# Altium PCB 7seg-rs485-slave.PcbDoc
Units mm, origin at the board's own origin, x right, y up, seen from the top; angles counter-clockwise.
Board outline 68.07 x 36.07 mm, 2 copper layers (Top Layer, Bottom Layer); 65 components, 59 nets, 207 pads, 0 vias.
Unrouted connection lines stored in the file: 139.
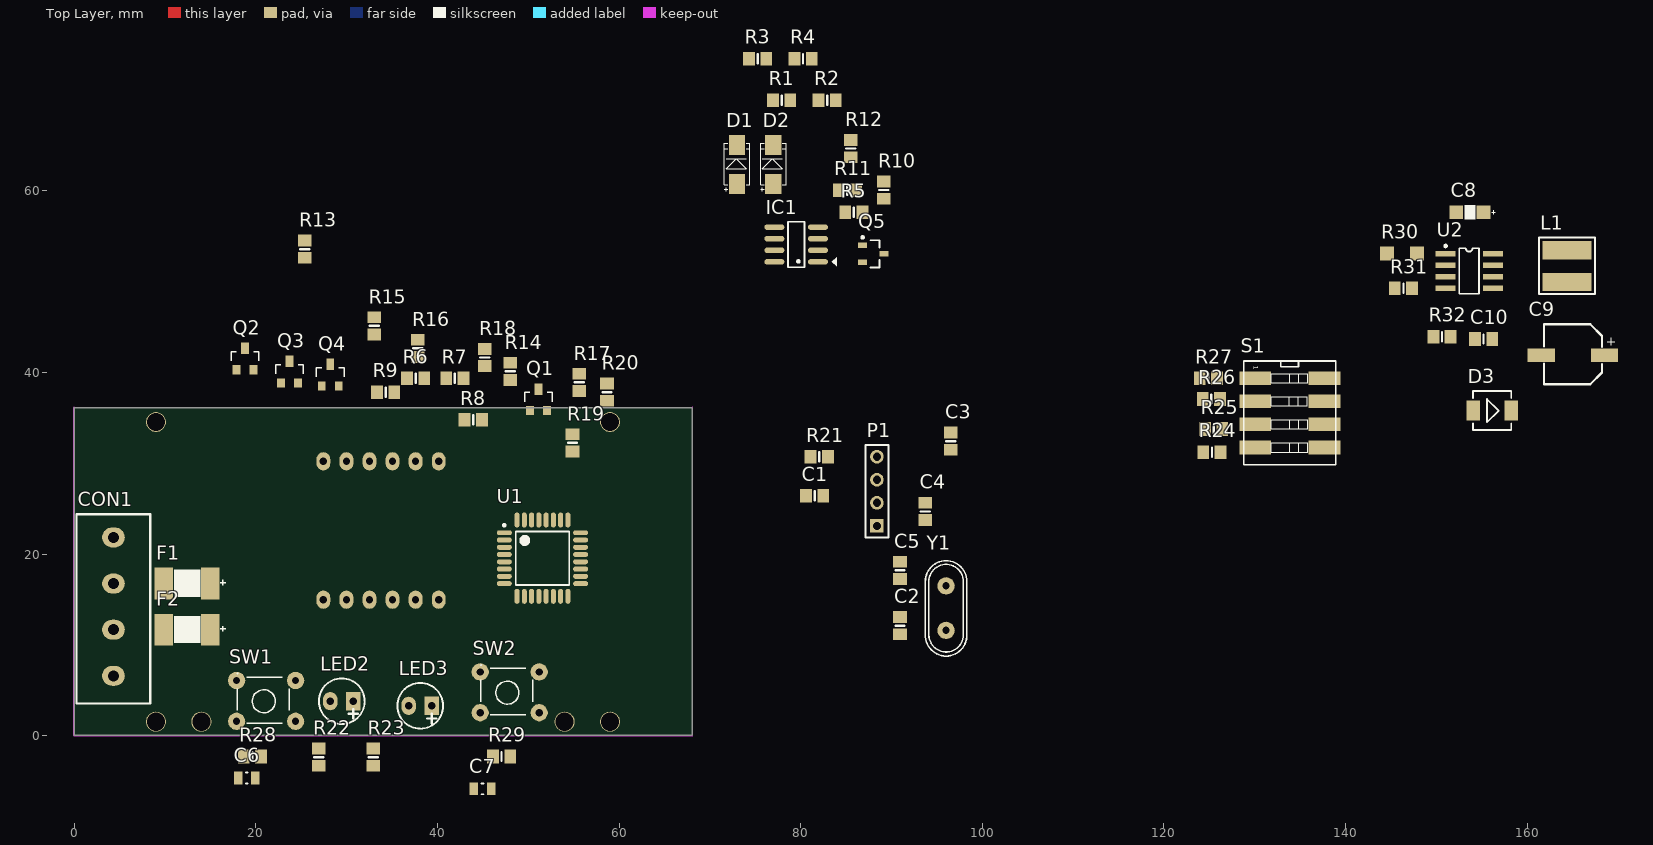
[diagram p0: Top Layer view]
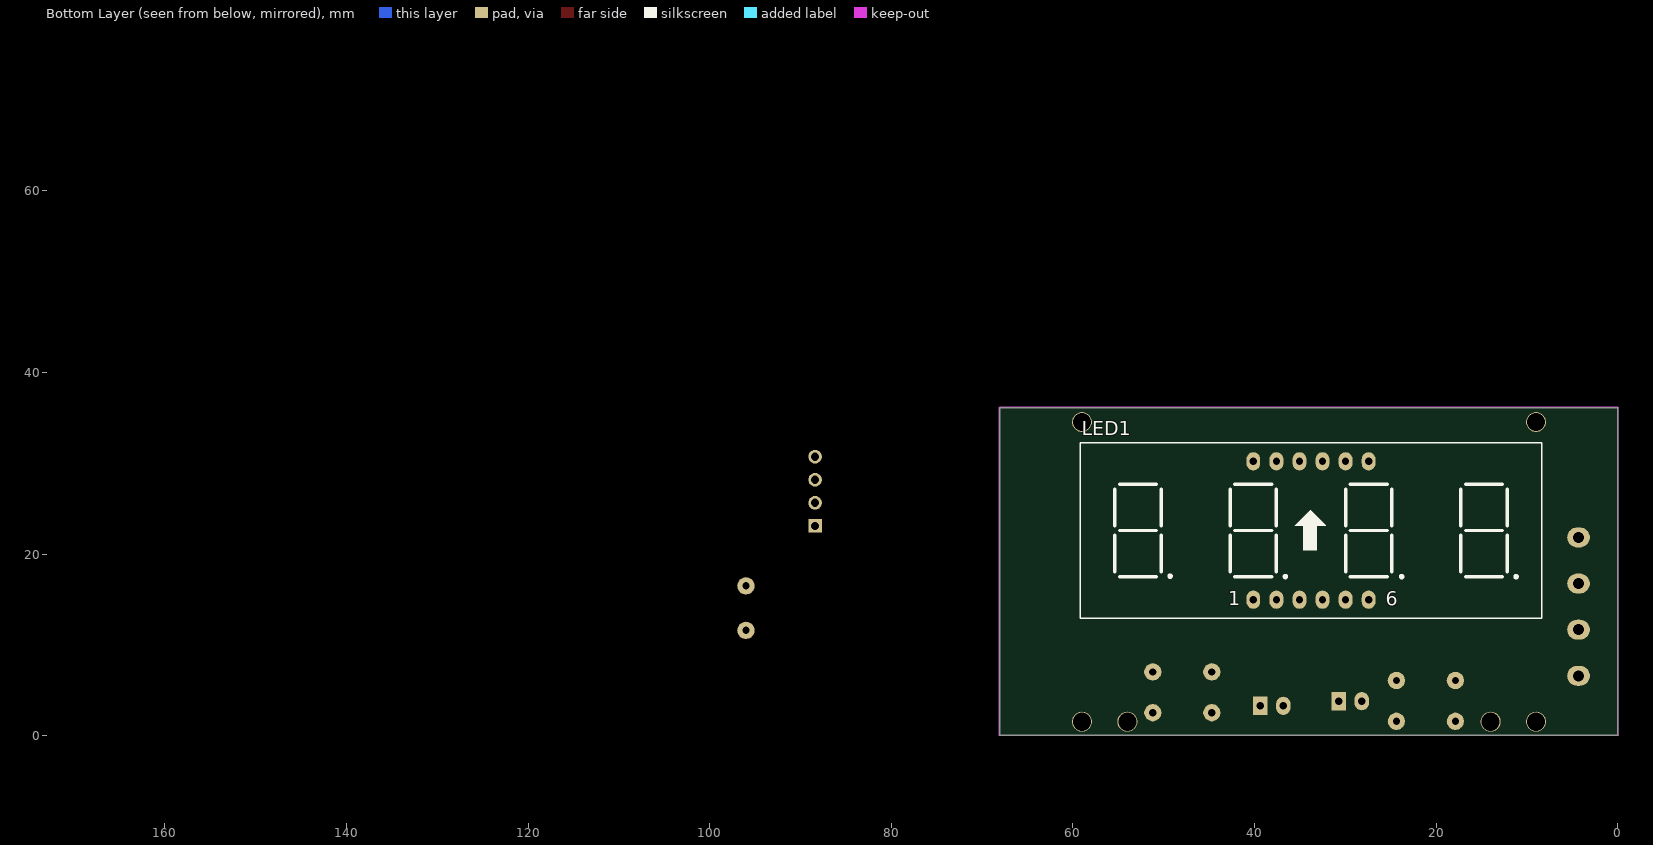
[diagram p1: Bottom Layer view, seen from below]

## Layer stack, top to bottom
Top Solder: solder mask 0.0102, Solder Resist, Dk 3.5
Top Layer: signal copper 0.0356
Dielectric1: dielectric 0.32, FR-4, Dk 4.8
Bottom Layer: signal copper 0.0356
Bottom Solder: solder mask 0.0102, Solder Resist, Dk 3.5

## Board outline
0,0.05 0,36.118 68.072,36.118 68.072,0.05

## Design rules (kind name [scope] priority, off if disabled: settings)
Clearance [All] p1: gap=0.254
PolygonConnect [All] p1: connectstyle=Relief reliefconductorwidth=0.254 reliefentries=4 polygonreliefangle="90 Angle" airgapwidth=0.254
RoomDefinition 7seg-rs485-slave [InComponentClass('7seg-rs485-slave')] p1: confinementstyle=ConfineIn formatcopy=TRUE lockcomponents=FALSE outline 69.967,3.017 466.967,3.017 466.967,58.017 69.967,58.017
RoutingVias [All] p1: holewidth=0.6 width=1.1 viastyle="Through Hole" minholewidth=0.6 minwidth=1.1 maxholewidth=0.6 maxwidth=1.1
SilkToSolderMaskClearance SilkscreenOverComponentPads [IsPad] p1: minsilkscreentomaskgap=0.254 clearancetoexposedcopper=TRUE
SolderMaskExpansion [All] p1: expansion=0.102
Width [All] p1: maxlimit=1.27 minlimit=0.254 preferedwidth=0.762
29 further rules are at their usual default settings.

## Components (designator, comment, footprint, x,y, rotation, side; value= is the part's Value field where it differs from the comment)
C1 "100nF" C0805 81.534,26.416 r0 top
C2 "22p" C0805 90.932,12.126 r90 top
C3 "0.1uF" C0805 96.52,32.446 r90 top
C4 "100nF" C0805 93.726,24.704 r270 top
C5 "22p" C0805 90.932,18.222 r270 top
C6 "100nF" "CM 0805" 19.001,-4.641 r0 top
C7 "100nF" "CM 0805" 44.958,-5.842 r0 top
C8 "10uF/16V" C1206 155.094,57.658 r180 top
C9 "220uF/16V" "CAPACITOR SIZE_D(D6.6)" 168.525,41.91 r180 top
C10 "33pF" C0805 155.194,43.688 r180 top
CON1 "Terminal 4" "Terminal 4 5.08" 4.318,21.844 r90 top
D1 "SMAJ18" "DO-214AC (SMA)" 72.491,61.667 r90 top
D2 "SMAJ18" "DO-214AC (SMA)" 76.491,61.667 r90 top
D3 "SS24" DO-214AA 154.051,35.814 r0 top
F1 "JK600-150U" PTC1812 12.276,16.764 r90 top
F2 "JK600-150U" PTC1812 12.276,11.684 r90 top
IC1 "MAX485" SO-8 79.502,54.102 r180 top
L1 "Inductor Iron" 4848 164.375,49.959 r90 top
LED1 "LED7SEG_X4" 7SEGQ 33.782,22.606 r180 bottom
LED2 "LED5" LED3MM 29.464,3.81 r0 top
LED3 "LED5" LED3MM 38.1,3.302 r0 top
P1 "Header 4" HDR1X4 88.392,26.924 r90 top
Q1 "A1015" SC-43-BCE 51.13,36.995 r0 top
Q2 "A1015" SC-43-BCE 18.796,41.491 r0 top
Q3 "A1015" SC-43-BCE 23.698,40.043 r0 top
Q4 "A1015" SC-43-BCE 28.194,39.713 r0 top
Q5 "C1815" 2SC1815 87.999,53.078 r0 top
R1 "10k" R0805 77.907,70.001 r0 top
R2 "10k" R0805 82.907,70.001 r0 top
R3 "20k" R0805 75.257,74.573 r0 top
R4 "120" R0805 80.257,74.573 r0 top
R5 "4k7" R0805 85.852,57.658 r0 top
R6 "2.2k" R0805 37.592,39.37 r0 top
R7 "2.2k" R0805 41.91,39.37 r0 top
R8 "2.2k" R0805 43.942,34.798 r0 top
R9 "2.2k" R0805 34.29,37.846 r0 top
R10 "10k" R0805 89.141,60.095 r90 top
R11 "2.2k" R0805 85.141,60.095 r0 top
R12 "20k" R0805 85.491,64.667 r90 top
R13 "1K" R0805 25.4,53.594 r90 top
R14 "1K" R0805 48.006,40.132 r90 top
R15 "1K" R0805 33.02,45.146 r90 top
R16 "1K" R0805 37.846,42.672 r90 top
R17 "1K" R0805 55.626,38.928 r90 top
R18 "1K" R0805 45.212,41.656 r90 top
R19 "1K" R0805 54.864,32.258 r90 top
R20 "1K" R0805 58.674,37.846 r90 top
R21 "10k" R0805 82.042,30.734 r0 top
R22 "10k" R0805 26.941,-2.355 r90 top
R23 "10k" R0805 32.941,-2.355 r90 top
R24 "10k" R0805 125.288,31.242 r0 top
R25 "10k" R0805 125.476,33.782 r0 top
R26 "10k" R0805 125.222,37.084 r0 top
R27 "10k" R0805 124.902,39.37 r0 top
R28 "10k" R0805 19.624,-2.286 r180 top
R29 "10k" R0805 47.056,-2.286 r180 top
R30 "0.15/R1206" R1206 147.849,53.119 r180 top
R31 "44.2K/1%" R0805 146.37,49.276 r180 top
R32 "10K/1%" R0805 150.622,43.942 r180 top
S1 "SW DIP-4" DIP8/W0.3K 130.048,39.37 r270 top
SW1 "SW" SW4 24.384,1.596 r180 top
SW2 "SW" SW4 51.204,2.54 r180 top
U1 "STM8S003K3T6" LQFP32_N 51.562,19.558 r0 top
U2 "MC34063" SO8-150mil 153.61,51.181 r270 top
Y1 "8MHz" XT2 96.012,14.06 r90 top

## Footprints (in the part's own frame and the unit in brackets; to place one, negate y for a bottom-side part, rotate by r counter-clockwise, add the part's x,y. Pads: shape width x height; smd on the part's side, far side on the other; paste and mask are expansions set on the pad)
2SC1815 [mm] "2SC1815 SMD"
  rect 1x0.6 smd: 1(-1.175,0.95) 2(-1.175,-0.95) 3(1.175,0)
  silkscreen extent -1.3,-1.5 0.67,1.92, body extent -1.34,-1.5 1.3,1.5, height 1.08
7SEGQ [mm] "DIP 12 Leads; Body 48 x 20 mm; Pitch 0.5 mm"
  oval 1.524x2 hole 0.8: 1(-6.35,-7.62) 2(-3.81,-7.62) 3(-1.27,-7.62) 4(1.27,-7.62) 5(3.81,-7.62) 6(6.35,-7.62) 7(6.35,7.62) 8(3.81,7.62) 9(1.27,7.62) 10(-1.27,7.62) 11(-3.81,7.62) 12(-6.35,7.62)
  silkscreen extent -25.4,-9.65 25.4,9.65, body extent -25.15,-9.5 25.15,9.5, height 8
4848 [mm]
  rect 2x5.4 smd: 1(0,0) 2(3.5,0)
  silkscreen extent -1.32,-3.09 4.92,3.08, body extent -0.7,-2.4 4.2,2.5, height 2.91
C0805 [mm] "Chip Capacitor; Body 2.0 x 1.2 mm (LxW typ)"
  rect 1.3x1.5 smd: 1(0.95,0) 2(-0.95,0)
  silkscreen extent 0,-0.5 0,0.5, body extent -1.02,-0.64 0.98,0.62, height 0.78
C1206 [mil]
  rect 60x60 smd: 1(-3.93,0) 2(114.18,0)
  silkscreen extent -55,-31 79,31, body extent -8,-31 118,31, height 63
"CAPACITOR SIZE_D(D6.6)" [mm]
  rect 3x1.5 smd: 1(0,0) 2(6.981,0)
  silkscreen extent -1.12,-3.4 6.68,3.2, body extent -0.02,-3.4 6.98,3.2, height 5.41
"CM 0805" [mm]
  rect 0.95x1.4 smd: 1(-0.95,0) 2(0.95,0)
  silkscreen extent -0.1,-0.6 0.1,0.6, body extent -0.97,-0.6 1.03,0.65, height 0.78
DIP8/W0.3K [mm] "8 PIN, W 400mil , L 450mil, Pin to pin 100mil For Switch"
  rect 1.5x3.5 smd: 1(0,0) 2(2.54,0) 3(5.08,0) 4(7.62,0) 5(7.62,7.62) 6(5.08,7.62) 7(2.54,7.62) 8(0,7.62)
  silkscreen extent -1.91,-1.27 9.53,8.89, body extent -2.03,-1.14 9.6,8.77, height 4.32
DO-214AA [mm] "DO-214-AA/SMB; 2 C-Bend Leads; Body 5.3 x 3.6 mm, inc. leads (LxW)"
  rect 1.52x2.18 smd: 1(0,0) 2(4.191,0)
  silkscreen extent 0,-2.16 4.19,2.16, body extent -0.65,-1.95 4.85,1.95, height 2.45
"DO-214AC (SMA)" [mm]
  rect 2.2x1.8 smd: 1(-0.899,-0.5) 2(3.397,-0.5)
  silkscreen extent -1.7,-1.9 3.6,0.9, body extent -1.3,-1.8 3.9,0.8, height 2.3
HDR1X4 [mm] "Connector; Header; 4 Position"
  rect 1.5x1.5 hole 0.9: 1(-3.81,0)
  round 1.5 hole 0.9: 2(-1.27,0) 3(1.27,0) 4(3.81,0)
  silkscreen extent -5.08,-1.27 5.08,1.27, body extent -5.09,-1.25 5.07,1.24, height 8.54
LED3MM [mm]
  rect 1.6x2 hole 0.8: 1(1.27,0)
  oval 1.6x2 hole 0.8: 2(-1.27,0)
  silkscreen extent -2.51,-2.52 2.52,2.51, body extent -1.99,-1.99 1.99,1.5, height 5.38
LQFP32_N [mm] "Thin QFP, 32-Leads, Body 7x7mm, Pitch 0.8mm, IPC Medium Density"
  oval 1.65x0.55 smd: 1(-4.2,2.8) 2(-4.2,2) 3(-4.2,1.2) 4(-4.2,0.4) 5(-4.2,-0.4) 6(-4.2,-1.2) 7(-4.2,-2) 8(-4.2,-2.8) 17(4.2,-2.8) 18(4.2,-2) 19(4.2,-1.2) 20(4.2,-0.4) 21(4.2,0.4) 22(4.2,1.2) 23(4.2,2) 24(4.2,2.8)
  oval 0.55x1.65 smd: 9(-2.8,-4.2) 10(-2,-4.2) 11(-1.2,-4.2) 12(-0.4,-4.2) 13(0.4,-4.2) 14(1.2,-4.2) 15(2,-4.2) 16(2.8,-4.2) 25(2.8,4.2) 26(2,4.2) 27(1.2,4.2) 28(0.4,4.2) 29(-0.4,4.2) 30(-1.2,4.2) 31(-2,4.2) 32(-2.8,4.2)
  silkscreen extent -4.32,-2.95 2.95,3.75, body extent -3.5,-3.5 3.5,3.5, height 1.6
PTC1812 [mm]
  rect 3.5x2.032 smd: 1(0,-2.7) 2(0,2.395)
  silkscreen extent -1.47,-4.4 1.53,1.27, body extent -1.68,-2.67 1.73,2.06, height 1.34
R0805 [mm] "Chip Resistor; Body 2.0 x 1.2 mm (LxW typ)"
  rect 1.3x1.5 smd: 1(0.95,0) 2(-0.95,0)
  silkscreen extent 0,-0.5 0,0.5, body extent -1,-0.65 1,0.6, height 0.78
R1206 [mil]
  rect 60x60 smd: 1(0,0) 2(130,0)
  body extent 4,-31 130,31, height 39
SC-43-BCE [mil]
  rect 34x40 smd: B(-37.02,-46.5) E(37.02,-46.5)
  rect 34x50 smd: C(0.02,46.5)
  silkscreen extent -60,-8 60,32, body extent -57,-52 57,58, height 41
SO8-150mil [mm] "Small Outline; 8 Leads; Body Width 3.9 mm; Pitch 1.27 mm"
  rect 0.6x2.2 smd: 1(-1.905,-2.6) 2(-0.635,-2.6) 3(0.635,-2.6) 4(1.905,-2.6) 5(1.905,2.6) 6(0.635,2.6) 7(-0.635,2.6) 8(-1.905,2.6)
  silkscreen extent -2.88,-2.72 2.5,1.1, body extent -2.5,-2.95 2.4,3.05, height 1.7
SO-8 [mm] "8-Pin Small Outline Integrated Circuit 1.27 mm Pitch, IPC Medium Density"
  oval 2.2x0.6 smd: 1(-2.4,1.905) 2(-2.4,0.635) 3(-2.4,-0.635) 4(-2.4,-1.905) 5(2.4,-1.905) 6(2.4,-0.635) 7(2.4,0.635) 8(2.4,1.905)
  silkscreen extent -4.44,-2.5 0.9,2.5, body extent -2.93,-2.51 3.08,2.49, height 1.75
SW4 [mm] "SW button 4pin, 250 x250 mil"
  round 1.905 hole 0.787: 1(0,0) 2(6.5,-4.5) 3(6.5,0) 4(0,-4.5)
  silkscreen extent 0.71,-5.26 6.43,0.2, body extent -0.8,-5.16 7.41,0.84, height 9.5
"Terminal 4 5.08" [mm] "Terminal block 5.08mm 3 ways"
  oval 2.2x2.5 hole 1.2: 1(0,0) 2(-5.08,0) 3(-10.16,0) 4(-15.24,0)
  silkscreen extent -18.29,-4.06 2.54,4.06, body extent -18.32,-4.06 2.57,4.04, height 10
XT2 [mm] "Footpin for Crystal 2 pin"
  round 1.905 hole 0.8: 1(-2.45,0) 2(2.45,0)
  silkscreen extent -5.28,-2.29 5.21,2.29, body extent -5.68,-2.36 5.68,2.29, height 3.5

## Part data
C1 C3 C4 C6 C7: library part "CM Ceramic", "SMD Ceramic  Capacitor"
C2 C5: library part "Cap Semi", "Capacitor (Semiconductor SIM Model)"
C8 C9: library part "Cap Pol3", "Polarized Capacitor (Surface Mount)"
C10: library part "Cap Semi", "Capacitor 100n 16V 0603"
D1 D2: library part Diode_TVS
D3: library part "D Schottky", "Schottky Diode"
F1 F2: library part "Fuse Thermal", "Thermal Fuse"
IC1: "RS232 - RS485 (Same sn75176)"
L1: "Magnetic-Core Inductor"
LED2 LED3: library part "LED 5mm", "LED 5mm"
P1: "Header, 4-Pin"
Q1 Q2 Q3 Q4: library part "PNP Transistor"
Q5: "NPN SMD Transistor"
R1 R2 R3 R4 R5 R6 R7 R8 R9 R10 R11 R12 R21 R22 R23 R24 R25 R26 R27 R28 R29: library part Res3, "Resistor"
R13 R14 R15 R16 R17 R18 R19 R20: library part Res1, "RES 120 OHM 1/10W 1% 0603 SMD"
R30 R31 R32: library part Res3, "Resistor 10k 0603"
S1: "DIP Switch, 4 Position, SPST"
SW1 SW2: library part SW4-1, "Switch button 4 pin"
U1: library part STM8L101K3T6, "STM8S ARM-based EnergyLite 8-bit MCU, 8 kB Flash, 1.5 kB Internal RAM, -40 to +85°C Temperature, 32-pin LQFP, Tray"
Y1: library part XTAL, "Crystal Oscillator"

## Free pads (board coordinates)
  round 2.2 hole 2: 0(9,1.55) 1(14,1.55) 2(54,1.55) 3(59,1.55) 4(59,34.55) 5(9,34.55)

## Nets (pads, with @x,y where several pads share a name; then routed paths per layer and width w, separated by ;. In a path a pad name is that pad's centre, name@x,y a point inside that pad or via, vN(x,y) a via of type N, cw(c..) or ccw(c..) an arc to the next point about the centre after c; other vN are vias at no path point)
5V: C4.2 C8.1 C9.1 IC1.8 L1.1 LED2.1 LED3.1 P1.1 Q1.E Q2.E Q3.E Q4.E R1.2 R2.2 R3.2 R21.1 R24.2 R25.2 R26.2 R27.2 R28.2 R29.2 R31.1 U1.6
A: R13.1 U1.16
B: R14.1 U1.15
BT1: C6.1 R28.1 SW1.2 SW1.4 U1.24
BT2: C7.1 R29.1 SW2.2 SW2.4 U1.32
C: R15.1 U1.14
D: R16.1 U1.13
D0: R27.1 S1.1 U1.25
D1: R26.1 S1.2 U1.27
D2: R25.1 S1.3 U1.28
D3: R24.1 S1.4 U1.29
DP: R20.1 U1.9
E: R17.1 U1.12
F: R18.1 U1.11
G: R19.1 U1.10
GND: C1.1 C2.1 C3.1 C4.1 C5.1 C6.2 C7.2 C8.2 C9.2 C10.2 CON1.4 D1.1 D2.1 D3.1 IC1.4 IC1.5 P1.3 Q5.2 R10.1 R12.1 R32.2 S1.5 S1.6 S1.7 S1.8 SW1.1 SW1.3 SW2.1 SW2.3 U1.4 U2.4
L1: R9.2 U1.18
L2: R8.2 U1.19
L3: R7.2 U1.20
L4: R6.2 U1.21
LED1: R22.1 U1.22
LED2: R23.1 U1.23
NetC3_2: C3.2 U1.5
NetC10_1: C10.1 U2.3
NetCON1_2: CON1.2 F1.2
NetCON1_3: CON1.3 F2.2
NetD1_2: D1.2 F2.1 IC1.6 R3.1 R4.1
NetD2_2: D2.2 F1.1 IC1.7 R4.2 R12.2
NetD3_2: D3.2 L1.2 U2.2
NetIC1_1: IC1.1 R1.1 R5.1
NetIC1_2: IC1.2 IC1.3 Q5.3 R2.1
NetLED1_1: LED1.1 R17.2
NetLED1_2: LED1.2 R16.2
NetLED1_3: LED1.3 R20.2
NetLED1_4: LED1.4 R15.2
NetLED1_5: LED1.5 R19.2
NetLED1_6: LED1.6 Q1.C
NetLED1_7: LED1.7 R14.2
NetLED1_8: LED1.8 Q2.C
NetLED1_9: LED1.9 Q3.C
NetLED1_10: LED1.10 R18.2
NetLED1_11: LED1.11 R13.2
NetLED1_12: LED1.12 Q4.C
NetLED2_2: LED2.2 R22.2
NetLED3_2: LED3.2 R23.2
NetQ1_B: Q1.B R6.1
NetQ2_B: Q2.B R7.1
NetQ3_B: Q3.B R8.1
NetQ4_B: Q4.B R9.1
NetQ5_1: Q5.1 R11.1
NetR30_1: R30.1 U2.1 U2.7 U2.8
NetR31_2: R31.2 R32.1 U2.5
NRST: C1.2 P1.4 R21.2 U1.1
OSC_IN: C2.2 U1.2 Y1.1
OSC_OUT: C5.2 U1.3 Y1.2
RX: R5.2 R10.2 U1.31
SWIM: P1.2 U1.26
TX: R11.2 U1.30
VIN: CON1.1 R30.2 U2.6
pads on no net: U1.7 U1.8 U1.17

## Keep-outs
Keep-Out Layer:
  lines w0.1: -0.05,0.05 ccw(c0,0.05) 0,0 ; -0.05,0.05 ccw(c0,0.05) 0,0 ; -0.05,0.05 -0.05,36.118 ; -0.05,36.118 cw(c0,36.118) 0,36.168 ; -0.05,36.118 cw(c0,36.118) 0,36.168 ; 0,0 68.072,0 ; 0,36.168 68.072,36.168 ; 68.072,0 ccw(c68.072,0.05) 68.122,0.05 ; 68.072,0 ccw(c68.072,0.05) 68.122,0.05 ; 68.072,36.168 cw(c68.072,36.118) 68.122,36.118 ; 68.072,36.168 cw(c68.072,36.118) 68.122,36.118 ; 68.122,0.05 68.122,36.118

## Text inside footprints (layer, text, board x,y; h text height)
LED1: Bottom Overlay "1" at 42.875,14.376 h1.52; Bottom Overlay "6" at 25.527,14.326 h1.52
S1: Top Overlay "1" at 129.896,40.742 h0.51 r270